# Altium PCB MB1137.PcbDoc (part 4 of 4)
Units mil, origin at the board's own origin, x right, y up, seen from the top; angles counter-clockwise.
Board outline 2760.94 x 5254.68 mil, 6 copper layers (Top Layer, GND, Signal, PWR, GND (Mid2), Bottom Layer), stack 74.545 mil thick; 293 components, 281 nets, 1134 pads, 921 vias.
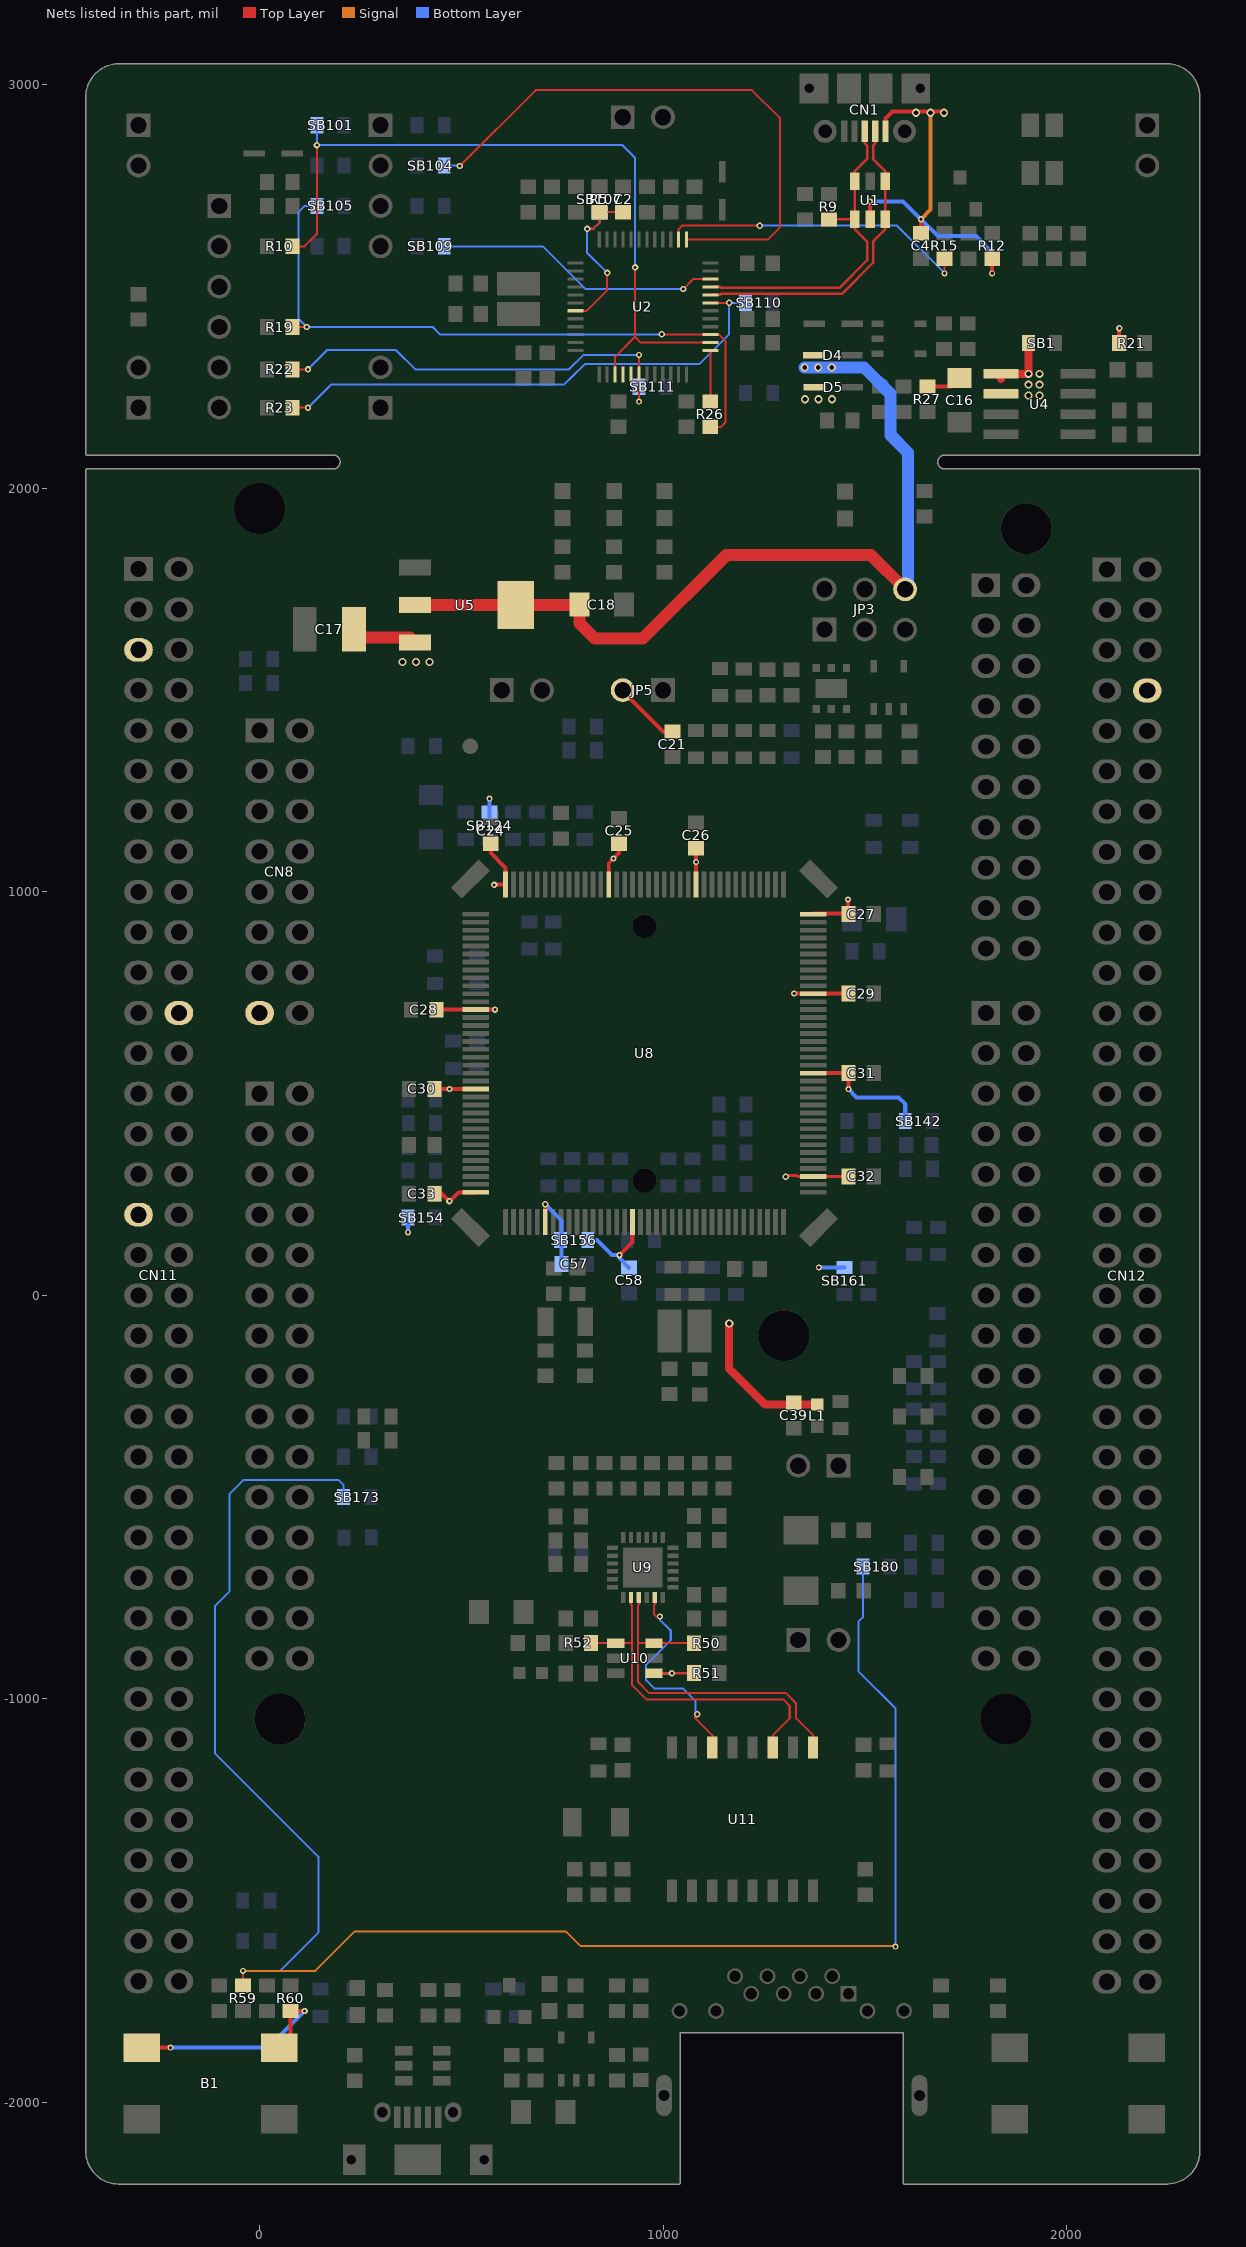
[diagram p8: the nets of this part, all layers, seen from the top]

## Via types
v1: diameter 16, hole 8, Top Layer to Bottom Layer, tented both sides, 464 vias
v2: diameter 15, hole 8, Top Layer to Bottom Layer, tented both sides, 415 vias
v3: diameter 20, hole 12, Top Layer to Bottom Layer, tented both sides, 39 vias
v4: diameter 25.98, hole 12.99, Top Layer to Bottom Layer, tented both sides, 2 vias
v5: diameter 15, hole 8, Top Layer to Bottom Layer, 1 vias

## Nets (pads, with @x,y where several pads share a name; then routed paths per layer and width w, separated by ;. In a path a pad name is that pad's centre, name@x,y a point inside that pad or via, vN(x,y) a via of type N, cw(c..) or ccw(c..) an arc to the next point about the centre after c; other vN are vias at no path point) (continued)
RD_P: R51.1 U9.23 U10.1 U11.6 | length 697.2
  Top Layer w5: R51.1@1076.1,-936.4 R51.1@1076.5,-936
  Top Layer w5.1: U10.1@977.56,-936.4 v1(1022,-936.4) R51.1@1076.1,-936.4 ; U9.23@979.53,-749.12 979.53,-766.15 977.19,-768.49 977.19,-789.5 983.03,-795.34 991.34,-795.34 v2(992,-796) ; v1(1085,-1038) 1079.5,-1043.5 1079.5,-1047.65 1122,-1090.15 U11.6@1122,-1120.44
  Bottom Layer w5: 958,-936 958.4,-936.4
  Bottom Layer w5.1: 958.4,-936.4 v1(1022,-936.4) ; v2(992,-796) 992,-803.54 1019,-830.54 1019,-854.21 958,-915.21 958,-936 958,-954 977.85,-973.85 1049,-973.85 1080.08,-1004.92 1080.08,-1033.07 v1(1085,-1038)
STLINK_USB_DM: CN1.2 U1.1 U1.6 U2.32 | length 788.8
  Top Layer w6.1: U2.32@1117.32,2479.53 1140.73,2479.53 1143.07,2481.87 1443.08,2481.87 1520.5,2559.29 1520.5,2611.95 1550.4,2641.85 U1.6@1550.4,2666.76 U1.1@1550.4,2761.24 1550.4,2786.85 1520.5,2816.75 1520.5,2849.76 1525.59,2854.85 CN1.2@1525.59,2885
STLINK_USB_DP: CN1.3 R9.1 U1.3 U1.4 U2.33 | length 828.8
  Top Layer w6.1: U2.33@1117.32,2499.21 1140.73,2499.21 1143.07,2496.87 1436.87,2496.87 1505.5,2565.5 1505.5,2611.95 1475.6,2641.85 U1.4@1475.6,2666.76 ; R9.1@1411,2666.5 1475.35,2666.5 U1.4@1475.6,2666.76 ; CN1.3@1500,2885 1500,2854.85 1505.5,2849.35 1505.5,2816.75 1475.6,2786.85 U1.3@1475.6,2761.24 U1.4@1475.6,2666.76
STM_JTCK: SB104.2 U2.37 | length 1453.6
  Top Layer w5: v1(496,2799) 684,2987 1220,2987 1290,2917 1290,2647 1260.32,2617.32 U2.37@1058.27,2617.32
  Bottom Layer w5: SB104.2@457.75,2800 495,2800 v1(496,2799)
STM_JTMS: SB109.2 U2.34 | length 716.8
  Top Layer w5: v2@1047,2494 v2(1050,2494) 1074.9,2518.9 U2.34@1117.32,2518.9
  Bottom Layer w5: SB109.2@457.75,2600 702,2600 808,2494 v2(1050,2494)
STM_RST: C2.2 R5.1 SB107.2 U2.7 | length 453.7
  Top Layer w5: U2.7@782.68,2440.1 810.42,2440.1 861.42,2491.1 v1(861.42,2534) ; v1@812,2644.53 827.64,2644.53 842,2658.89 R5.1@842,2684.5 C2.2@901,2684.5
  Bottom Layer w5: SB107.2@843,2682.25 843,2659 827,2643 v1(812,2643) 812,2583.42 v1(861.42,2534)
T_JTCK: R10.2 SB101.1 U2.15 U2.26 | length 1894
  Top Layer w5: R10.2@81.5,2600 111.25,2600 142.25,2631 v1(142.25,2851) ; U2.15@881.1,2282.68 U2.15@881.1,2282.68 881.1,2326.46 930.53,2375.89 ; v1(930.53,2547.64) 930.53,2375.89 ; U2.26@1117.32,2361.42 945,2361.42 930.53,2375.89
  Bottom Layer w5: SB101.1@142.25,2900 v1(142.25,2851) 899,2851 930.53,2819.47 v1(930.53,2547.64)
T_JTDI: U2.17
T_JTDO: U2.16
T_JTMS: R19.2 R26.2 SB105.1 U2.27 | length 1677.1
  Top Layer w5: R19.2@81.5,2400 v1(117,2400) ; v1@997.9,2381.1 U2.27@1117.32,2381.1 1138.94,2381.1 1154.5,2365.54 1154.5,2163.3 1143.7,2152.5 R26.2@1117,2152.5
  Bottom Layer w5: SB105.1@142.25,2700 112,2700 96,2684 96,2421 v1(117,2400) 429,2400 447.9,2381.1 v1@997.9,2381.1
  other v1: 997,2382
T_NRST: R22.2 SB111.1 U2.18 | length 1072.7
  Top Layer w5: R22.2@81.5,2295 v1@119.94,2295 ; v2(940.16,2215) U2.18@940.16,2282.68 v2(940.16,2331)
  Bottom Layer w5: v1@116,2294.94 v1(120,2294.94) ; v1@121.94,2294.94 v1(120,2294.94) ; v2(940.16,2215) 940.25,2215.09 SB111.1@940.25,2252 ; v2(940.16,2331) 803,2331 766.94,2294.94 385.4,2294.94 336.95,2343.39 168.45,2343.39 v1(120,2294.94)
T_SWDIO_IN: R26.1 U2.25 | length 125.9
  Top Layer w5: R26.1@1117.32,2215.82 U2.25@1117.32,2341.73
T_SWO: R23.2 SB110.1 U2.31 | length 1324.8
  Top Layer w5: R23.2@81.5,2200 v1(120,2200) ; U2.31@1117.32,2459.84 v1@1164.84,2459.84
  Bottom Layer w5: v1(120,2200) 177.03,2257.03 754.3,2257.03 774.67,2277.4 775.4,2277.4 806,2308 1090,2308 1164,2382 v1(1164,2460) 1164,2460.68 1164.84,2459.84 1165,2460 SB110.1@1204.25,2460
TD_N: R52.1 U9.20 U10.4 U11.3 | length 850.8
  Top Layer w5.1: R52.1@821.5,-861 883.07,-861 922.22,-861 ; U9.20@920.47,-749.12 920.47,-766.15 922.82,-768.49 922.82,-965.03 958.79,-1001 1297.37,-1001 1314,-1017.63 1314,-1048.15 1272,-1090.15 U11.3@1272,-1120.44
TD_P: R50.1 U9.21 U10.3 U11.1 | length 888.7
  Top Layer w5.1: 938.82,-862 977.56,-862 977.96,-862 R50.1@1076.5,-862 ; U9.21@940.16,-749.12 940.16,-766.15 937.82,-768.49 937.82,-957.81 965,-985 1303.59,-985 1330,-1011.41 1330,-1048.15 1372,-1090.15 U11.1@1372,-1120.44
  Top Layer w6: U10.3@977.56,-861.6 U10.3@977.96,-862
U5V: C4.2 C16.1 CN1.1 CN12.8 D5.1 R12.2 R21.1 R27.1 SB1.1 U1.5 U4.1 U4.2 | length 1260.5
  Top Layer w10: U1.5@1513,2666.76 v2(1513,2711) ; CN1.1@1551.18,2885 1551.18,2917.18 1568,2934 v3@1696,2934 ; C4.2@1639,2632.5 v2(1639,2667) ; R27.1@1655,2252.5 1713.5,2252.5 C16.1@1735,2274 ; v2(1815.7,2533) R12.2@1815.7,2569.5 ; R21.1@2130.5,2360 v1@2130.5,2396.5
  Top Layer w20: 1837.53,2271 U4.1@1837.53,2284 1905.25,2284 SB1.1@1905.25,2360
  Signal w10: v2(1639,2667) 1663,2691 v3(1663,2931)
  Bottom Layer w10: v2(1513,2711) 1595,2711 v2(1639,2667) 1681,2625 1775,2625 1815.7,2584.3 v2@1815.7,2537.3 ; v3(1696,2931) v3@1696,2934
  other v1: 2131,2397
  other v3: 1352,2221 1385.5,2221 1419,2221 1906,2230 1933,2230 1906,2257 1933,2257 1906,2284 1933,2284 1627,2931
USB_RENUMN: R15.2 U2.38 | length 773.2
  Top Layer w5: U2.38@1038.58,2617.32 1038.58,2642.58 1047,2651 v1(1239.75,2651) ; v2(1697.7,2533) R15.2@1697.7,2569.5
  Bottom Layer w5: v1(1239.75,2651) 1579.7,2651 v2(1697.7,2533)
USR_BUT: R59.2 SB173.2 SB180.1 | length 4458.8
  Top Layer w5: R59.2@-41,-1710.5 v2(-41,-1674)
  Signal w5: v2(-41,-1674) 138,-1674 235,-1577 760,-1577 796,-1613 1575,-1613 v2(1576,-1614)
  Bottom Layer w5: v2(-41,-1674) 51,-1674 145.5,-1579.5 145.5,-1391 -110,-1135.5 -110,-769 -74,-733 -74,-492 -39.97,-457.97 195.97,-457.97 208.25,-470.25 SB173.2@208.25,-500 ; SB180.1@1495.25,-672 1495.25,-797.75 1484,-809 1484,-931 1576,-1023 v2(1576,-1614)
VBAT: C57.1 CN11.33 SB156.2 U8.6 | length 209.3
  Top Layer w10: U8.6@707.94,181.69 v1(707.94,226.15)
  Bottom Layer w10: v1(707.94,226.15) 748.2,185.88 C57.1@748.2,78
VDD: B1.2 B1.3 C21.1 C24.1 C25.1 C26.1 C27.1 C28.1 C29.1 C30.1 C31.1 C32.1 C33.1 C39.1 C58.1 CN11.5 JP5.2 L1.1 R60.1 SB124.2 SB142.2 SB154.2 SB156.1 SB161.1 U8.17 U8.39 U8.52 U8.62 U8.72 U8.84 U8.95 U8.108 U8.121 U8.131 U8.144 | length 2955.3
  Top Layer w8: U8.95@865.42,1018.31 865.42,1071.42 v2(877,1083) ; v1(1304,294) 1307.2,297.2 1331.21,297.2 1333.53,294.88 U8.39@1372.31,294.88 1372.43,295 C32.1@1459.5,295
  Top Layer w10: B1.2@-292.28,-1864.42 v2(-220.58,-1864.42) ; B1.3@48.28,-1864.42 77,-1835.69 R60.1@77,-1773.5 v1(111.5,-1773.5) ; C33.1@433.5,252 451.42,252 470.42,233 492.93,255.51 U8.144@535.69,255.51 ; C30.1@434.08,511.42 v2(470.58,511.42) U8.131@535.69,511.42 ; C28.1@439,708 v1@583.2,708 ; C24.1@573,1119.5 573,1095.97 609.51,1059.46 U8.108@609.51,1018.31 582.31,1018.31 v1(581.2,1017.2) ; v2(877,1083) 891,1097 C25.1@891,1119.5 ; v1(892,100) 924.47,132.47 U8.17@924.47,181.69 ; JP5.2@900,1500 900,1497.74 1000.24,1397.5 C21.1@1023,1397.5 ; U8.84@1081.95,1018.31 1081.95,1082.95 1082,1083 C26.1@1082,1108.5 C26.1@1082,1119.5 ; v2(1325,748) C29.1@1459.5,748 C29.1@1459.14,747.64 ; U8.52@1372.31,550.79 1459.29,550.79 C31.1@1459.5,551 v2(1459.5,511) ; U8.72@1372.31,944.49 1374.02,946.2 C27.1@1458.3,946.2 ; v2(1458,981) 1458,946.5 C27.1@1458.3,946.2 ; C32.1@1459.39,294.88 C32.1@1459.5,295 ; C27.1@1459.5,945 C27.1@1458.3,946.2
  Top Layer w20: v3(1164,-70) 1163.32,-70 1163.32,-181.11 1252.7,-270.5 L1.1@1382,-270.5
  Bottom Layer w10: v2(-220.58,-1864.42) 20.57,-1864.42 v1(111.5,-1773.5) ; v2(368.19,156.32) SB154.2@368.19,192.83 ; SB124.2@570,1184.75 SB124.2@570,1197.75 v2(570,1231) ; SB156.1@813.45,137 836,137 873,100 v1(892,100) 892,92.5 C58.1@916,68.5 ; v2(1386,69) 1386.45,69.45 SB161.1@1450,69.45 ; v2(1459.5,511) 1479.5,491 1583,491 1600.25,473.75 SB142.2@1600.25,432
  other v1: 470.42,233.71 583.46,708.27
  other v2: 1082,1074
VIN: C17.1 CN8.15 CN11.24 U5.3 | length 201.6
  Top Layer w20: C17.1@234.02,1614.02 C17.1@234.02,1651
  Top Layer w30: C17.1@234.02,1651 255.02,1630 373,1630 U5.3@385,1618
  other v3: 354.24,1570 387.74,1570 421.24,1570
VIN_5V: C18.1 D4.1 JP3.6 U5.2 U5.4 | length 2142.7
  Top Layer w20: C18.1@792,1711 C18.1@793,1712
  Top Layer w30: U5.2@385,1711 U5.4@635,1711 C18.1@792,1711 ; C18.1@793,1712 793,1666 831,1628 950,1628 1157,1835 1515,1835 JP3.6@1600,1750
  Bottom Layer w30: v3(1351,2300) v3(1384.5,2300) v3(1418,2300) 1497.71,2300 1563.5,2234.21 1563.5,2132.25 1606.61,2089.14 1606.61,1756.61 JP3.6@1600,1750
pads on no net: CN1.11 CN8.1 CN11.10 CN11.26 U2.4 U2.11 U2.14 U2.19 U2.22 U2.40 U2.41 U2.42 U2.43 U2.45 U2.46 U6.3 U6.5 U8.0 U11.4 U11.5 U11.12 U11.13

## Polygon pours and split planes (outlines as drawn)
GND on Bottom Layer "GND" (solid, remove dead copper, pour order 26): -427.95,-2121.26 ccw(c-349.21,-2121.26) -349.21,-2200 -349.21,-2200.04 48,-2200.04 1043.41,-2200.04 2249.06,-2200.04 ccw(c2249.06,-2121.3) 2327.8,-2121.3 2327.8,-2121.1 2327.95,-2121.1 2327.95,2970.87 ccw(c2249.21,2970.87) 2249.21,3049.61 -349.21,3049.61 ccw(c-349.21,2970.87) -427.95,2970.87 -427.95,-2121.26
GND on Signal "GND" (solid, remove dead copper, pour order 27): -427.95,-2121.26 ccw(c-349.21,-2121.26) -349.21,-2200 -349.21,-2200.04 48,-2200.04 1043.41,-2200.04 2249.06,-2200.04 ccw(c2249.06,-2121.3) 2327.8,-2121.3 2327.8,-2121.1 2327.95,-2121.1 2327.95,2970.87 ccw(c2249.21,2970.87) 2249.21,3049.61 -349.21,3049.61 ccw(c-349.21,2970.87) -427.95,2970.87 -427.95,-2121.26
GND on Top Layer "GND" (solid, remove dead copper, pour order 28): -427.95,-2121.26 ccw(c-349.21,-2121.26) -349.21,-2200 -349.21,-2200.04 48,-2200.04 1043.41,-2200.04 2249.06,-2200.04 ccw(c2249.06,-2121.3) 2327.8,-2121.3 2327.8,-2121.1 2327.95,-2121.1 2327.95,2970.87 ccw(c2249.21,2970.87) 2249.21,3049.61 -349.21,3049.61 ccw(c-349.21,2970.87) -427.95,2970.87 -427.95,-2121.26
GND on GND (Mid2) "GND" (solid, remove dead copper, pour order 21): -427.95,-2121.26 ccw(c-349.21,-2121.26) -349.21,-2200 -349.21,-2200.04 48,-2200.04 1043.41,-2200.04 2249.06,-2200.04 ccw(c2249.06,-2121.3) 2327.8,-2121.3 2327.8,-2121.1 2327.95,-2121.1 2327.95,2970.87 ccw(c2249.21,2970.87) 2249.21,3049.61 -349.21,3049.61 ccw(c-349.21,2970.87) -427.95,2970.87 -427.95,-2121.26
+5V on PWR "5V" (solid, remove dead copper, pour order 37): 1665.77,1684.11 cw(c1665.77,1647.08) 1702.81,1647.08 1702.81,-296.19 cw(c1680,-296.19) 1680,-319 1278.44,-318.85 ccw(c1278.44,-336.44) 1260.85,-336.44 1260.79,-663.19 cw(c1234.19,-663.19) 1234.19,-689.79 704.57,-689.31 ccw(c704.57,-715.57) 678.31,-715.57 680.17,-2195.17 cw(c676.17,-2195.17) 676.17,-2199.17 490.95,-2199.05 cw(c490.95,-2192.05) 483.95,-2192.05 480.68,-601.27 cw(c502.27,-601.27) 502.27,-579.68 1179.1,-579.66 ccw(c1179.1,-550.1) 1208.66,-550.1 1208.32,-272.54 cw(c1234.54,-272.54) 1234.54,-246.32 1581.42,-246.21 ccw(c1581.42,-228.42) 1599.21,-228.42 1599,1518.78 ccw(c1562.68,1518.78) 1562.68,1555.1 1562.68,1555.37 467.26,1555.37 cw(c467.26,1556.48) 466.15,1556.48 466.15,1592.88 ccw(c443.94,1592.88) 443.94,1615.09 338.09,1615.09 ccw(c338.09,1589.91) 312.91,1589.91 312.91,868.14 cw(c298.95,868.14) 298.95,854.17 -228.79,854.17 cw(c-228.79,871.99) -246.61,871.99 -246.61,1014.11 cw(c-220.95,1014.11) -220.95,1039.77 142.47,1039.77 ccw(c142.47,1052.8) 155.5,1052.8 155.5,1679.61 cw(c234.72,1679.61) 234.72,1758.83 1106.99,1758.83 cw(c1106.99,1740.98) 1124.84,1740.98 1124.84,1700.82 ccw(c1141.89,1700.82) 1141.89,1683.77 1141.89,1684.11
AVDD on PWR "AVDD" (solid, remove dead copper, pour order 23): 1290,-325.62 1280.43,-325.62 ccw(c1280.43,-340.06) 1266,-340.06 1265.61,-443.65 ccw(c1270.35,-443.65) 1270.35,-448.39 1828.23,-449.12 ccw(c1828.23,-428.23) 1849.12,-428.23 1849,523.37 ccw(c1824.11,523.37) 1824.11,548.26 1778.21,548.26 cw(c1778.21,556.71) 1769.76,556.71 1769.76,646.68 cw(c1780,646.68) 1780,656.92 2292.76,656.92 ccw(c2292.76,678.83) 2314.68,678.83 2314.68,1336.32 ccw(c2302,1336.32) 2302,1349 2163.72,1349 cw(c2163.72,1370.99) 2141.73,1370.99 2141.73,1532.27 ccw(c2123,1532.27) 2123,1551 2061.14,1551 cw(c2061.14,1584.11) 2028.03,1584.11 2028.03,1589.08 ccw(c2006.14,1589.08) 2006.14,1610.97 1733.47,1610.97 ccw(c1733.47,1591.43) 1713.92,1591.43 1713.92,-293.97 cw(c1680.9,-293.97) 1680.9,-327 1272.85,-327 ccw(c1272.85,-329.43) 1270.42,-329.43
AGND on PWR "AGND" (solid, remove dead copper, pour order 25): 1806.21,652.42 1786.17,652.42 ccw(c1786.17,644.25) 1778,644.25 1778,559.1 ccw(c1783.1,559.1) 1783.1,554 1834.26,554 cw(c1834.26,533.26) 1855,533.26 1855,-434 cw(c1837,-434) 1837,-452 1309.69,-452 ccw(c1309.69,-487.91) 1273.78,-487.91 1273.78,-649.48 ccw(c1308.3,-649.48) 1308.3,-684 1571,-684 cw(c1571,-703) 1590,-703 1590,-2168 ccw(c1622,-2168) 1622,-2200 2252.45,-2200 ccw(c2252.45,-2122.14) 2330.31,-2122.14 2330.31,606.69 ccw(c2285,606.69) 2285,652
AVDD on PWR "AVDD" (solid, remove dead copper, pour order 22): 1742.08,1613.45 2002.63,1613.45 cw(c2002.63,1588.08) 2028,1588.08 ccw(c2062.08,1588.08) 2062.08,1554 2066,1554 2127.94,1554 cw(c2127.94,1540.94) 2141,1540.94 2141,1377 ccw(c2166,1377) 2166,1352 2299.61,1352 cw(c2299.61,1337) 2314.61,1337 2314.61,678.83 cw(c2292.77,678.83) 2292.77,657 1739.43,657 cw(c1739.43,682.43) 1714,682.43 1714,1597 cw(c1730,1597) 1730,1613
NetC44_2 on PWR "RMII" (solid, remove dead copper, pour order 36): 1557.72,-701.01 cw(c1557.72,-728.28) 1584.99,-728.28 1584.08,-1233.08 cw(c1553.08,-1233.08) 1553.08,-1264.08 722.53,-1263.51 cw(c722.53,-1234.47) 693.49,-1234.47 693.05,-712.12 cw(c703.12,-712.12) 703.12,-702.05
VIN on PWR "VIN" (solid, remove dead copper, pour order 34): 229.26,843.25 -221.2,843.25 ccw(c-221.2,818) -246.45,818 -246.45,630.44 ccw(c-228.01,630.44) -228.01,612 392.71,612 ccw(c392.71,675.29) 456,675.29 456,1592.14 ccw(c443.14,1592.14) 443.14,1605 338,1605 ccw(c338,1590) 323,1590 323,862 cw(c304,862) 304,843
NetC11_2 on PWR "VIN_2" (solid, remove dead copper, pour order 30): 2105.62,2375.29 ccw(c2096.91,2375.29) 2096.91,2384 1475,2384 ccw(c1475,2370) 1461,2370 1461,2353.46 cw(c1452,2353.46) 1452,2344.46 1194.29,2344.46 ccw(c1194.29,2322) 1171.83,2322 1171.83,2009.56 ccw(c1190,2009.56) 1190,1991.39 1442.06,1991.39 cw(c1442.06,1980.45) 1453,1980.45 1453.44,1705.6 ccw(c1465.6,1705.6) 1465.6,1693.44 1531.93,1693.17 ccw(c1531.93,1713.07) 1551.83,1713.07 1551.99,2019.49 ccw(c1538.58,2019.49) 1538.58,2032.89 1245.24,2032.89 cw(c1245.24,2049.12) 1229.01,2049.12 1229.01,2077.05 cw(c1249.75,2077.05) 1249.75,2097.78 1299.61,2097.78 ccw(c1299.61,2111.44) 1313.27,2111.44 1313.27,2238.59 cw(c1330.24,2238.59) 1330.24,2255.56 1838.98,2255.56 ccw(c1838.98,2266) 1849.41,2266 1849.41,2287.65 cw(c1873.14,2287.65) 1873.14,2311.38 2090.99,2311.38 ccw(c2090.99,2326) 2105.61,2326
E5V on PWR "E5V" (solid, remove dead copper, pour order 24): 1441,2434 cw(c1441,2428) 1447,2428 1447,2356.26 cw(c1444.74,2356.26) 1444.74,2354 1184.85,2354.15 ccw(c1184.85,2333.15) 1163.85,2333.15 1163.39,2005.95 ccw(c1185.95,2005.95) 1185.95,1983.39 1431.71,1983.86 cw(c1431.71,1972.73) 1442.84,1972.73 1442.64,1711.2 cw(c1426.8,1711.2) 1426.8,1695.36 1328.99,1695.69 cw(c1328.99,1706.99) 1317.69,1706.99 1318,1864 ccw(c1301,1864) 1301,1881 138,1881 ccw(c138,1847) 104,1847 cw(c90,1847) 90,1833 -81.74,1833 ccw(c-81.74,1819.93) -94.8,1819.93 -94.8,1542.39 cw(c-109,1542.39) -109,1528.19 -249.32,1528.19 cw(c-249.32,1539.87) -261,1539.87 -261,2011.9 cw(c-240,2011.9) -240,2032.9 1073.9,2032.9 ccw(c1073.9,2052) 1093,2052 1093,2415.27 cw(c1111.73,2415.27) 1111.73,2434 1551.87,2434 cw(c1551.87,2425.87) 1560,2425.87
+3V3 on PWR "3V3" (solid, remove dead copper, pour order 33): -248.19,1434.31 -248.4,1434.31 -248.4,1468 -248.4,1501.65 cw(c-234.15,1501.65) -234.15,1515.9 -95.92,1515.9 ccw(c-95.92,1530.53) -81.29,1530.53 -81.29,1801.52 cw(c-60.88,1801.52) -60.88,1821.93 105.53,1821.93 ccw(c105.53,1836.14) 119.74,1836.14 119.74,1847.74 cw(c143,1847.74) 143,1871 1301.51,1871 cw(c1301.51,1864.62) 1307.89,1864.62 1307.89,1700.89 cw(c1301,1700.89) 1301,1694 1141.89,1694 cw(c1141.89,1701) 1134.89,1701 1134.89,1761.03 ccw(c1127,1761.03) 1127,1768.92 233.17,1768.92 ccw(c233.17,1678) 142.25,1678 142.25,1074.26 cw(c124.08,1074.26) 124.08,1056.08 -232.08,1056.08 cw(c-232.08,1072) -248,1072 -248,1451
VBAT on PWR "VBAT" (solid, remove dead copper, pour order 32): -414.91,224 -414.91,229.43 cw(c-403.34,229.43) -403.34,241 215.04,241 cw(c215.04,189.04) 267,189.04 267,152.5 ccw(c299.5,152.5) 299.5,120 569.52,120 ccw(c569.52,148) 597.52,148 597.52,228.52 cw(c628,228.52) 628,259 714.43,259 cw(c714.43,249) 724.43,249 724.43,35.79 cw(c693.64,35.79) 693.64,5 -392,5 cw(c-392,28) -415,28
+3V3_ST_LINK on PWR "ST_3V3" (solid, remove dead copper, pour order 31): -335,3037 -353,3037 ccw(c-353,2975) -415,2975 -415,2107 ccw(c-406,2107) -406,2098 1080.53,2098 ccw(c1080.53,2104.47) 1087,2104.47 1087,2418.35 cw(c1109.65,2418.35) 1109.65,2441 1443.76,2441 cw(c1443.76,2428.46) 1456.3,2428.46 1456.3,2396.7 ccw(c1463,2396.7) 1463,2390 2096.07,2390 ccw(c2096.07,2399) 2105.07,2399 2105.07,2714 ccw(c2005.07,2714) 2005.07,2814 1996,2814 1488,2814 cw(c1488,2832) 1470,2832 1470,3022.06 ccw(c1455,3022.06) 1455,3037.06 -335,3037.06
U5V on PWR "U5V" (solid, remove dead copper, pour order 35): 1375.1,2247.98 1335.51,2247.98 ccw(c1335.51,2234) 1321.53,2234 1321.53,2110.79 ccw(c1335.32,2110.79) 1335.32,2097 1546.78,2097 cw(c1546.78,2085.78) 1558,2085.78 1558.07,1703.07 ccw(c1568.07,1703.07) 1568.07,1693.07 1686.49,1692.49 cw(c1686.49,1663.49) 1715.49,1663.49 1715,1636 ccw(c1730,1636) 1730,1621 2006,1621 cw(c2006,1589) 2038,1589 2038,1587 ccw(c2064,1587) 2064,1561 2129.01,1561 cw(c2129.01,1539) 2151.01,1539 2151.01,1381.54 ccw(c2172.55,1381.54) 2172.55,1360 2300,1360 ccw(c2300,1374) 2314,1374 2314,2026.58 ccw(c2307.88,2026.58) 2307.88,2032.7 1692.22,2032.7 cw(c1692.22,2045) 1679.92,2045 1679.92,2089.92 cw(c1685,2089.92) 1685,2095 2305,2095 ccw(c2305,2106) 2316,2106 2316,2976 ccw(c2254,2976) 2254,3038 1496.37,3038 ccw(c1496.37,3020) 1478.37,3020 1478.37,2844.63 ccw(c1502,2844.63) 1502,2821 2021.94,2821 cw(c2021.94,2723.94) 2119,2723.94 2119,2320.12 cw(c2100.88,2320.12) 2100.88,2302 1876.69,2302 ccw(c1876.69,2291) 1865.69,2291 1865.69,2267.69 cw(c1846,2267.69) 1846,2248
NetC51_2 on PWR "RMII_2" (solid, remove dead copper, pour order 38): 720.09,-1280 1554.49,-1279.51 cw(c1554.49,-1308.51) 1583.49,-1308.51 1585.18,-2175.08 cw(c1564.08,-2175.08) 1564.08,-2196.18 723.21,-2194.71 cw(c723.21,-2171.79) 700.29,-2171.79 699.31,-1289.49 cw(c708.49,-1289.49) 708.49,-1280.31
VDD on PWR "VDD" (solid, remove dead copper, pour order 40): -415.39,-815.16 -415,-815.16 -415,-823 -415,-2126 ccw(c-353,-2126) -353,-2188 331,-2188 ccw(c331,-2174) 345,-2174 345,-367.93 cw(c382.42,-367.93) 382.42,-330.52 1042.47,-330.52 ccw(c1042.47,-268.92) 1104.07,-268.92 1104.07,-203.86 cw(c1140,-203.86) 1140,-167.92 1444.14,-167.92 ccw(c1444.14,-127.97) 1484.09,-127.97 1484.09,1416.98 ccw(c1450,1416.98) 1450,1451.08 964.49,1451.08 cw(c964.49,1471.99) 943.58,1471.99 943.58,1534 ccw(c932.35,1534) 932.35,1545.23 482.16,1545.23 ccw(c482.16,1532.32) 469.24,1532.32 469.24,652.38 cw(c415.16,652.38) 415.16,598.29 -231.29,598.29 cw(c-231.29,621) -254,621 -254,2014.61 ccw(c-272.5,2014.61) -272.5,2033.11 -394,2033.11 ccw(c-394,2011.96) -415.15,2011.96 -415.15,278 ccw(c-389.07,278) -389.07,251.92 225.17,251.92 cw(c225.17,192) 285.09,192 285.09,150.82 ccw(c303,150.82) 303,132.91 562.75,132.91 ccw(c562.75,154.92) 584.76,154.92 584.76,243.86 cw(c616,243.86) 616,275.1 712.85,275.1 cw(c712.85,252.04) 735.91,252.04 735.91,30.57 cw(c696.63,30.57) 696.63,-8.71 -384.69,-8.71 ccw(c-384.69,-39.21) -415.19,-39.21 -415.19,-822.98
+3V3_PER on PWR "3V3" (solid, remove dead copper, pour order 39): 474.79,-1819 474.6,-2196.13 cw(c469.13,-2196.13) 469.13,-2201.6 365.69,-2201.6 cw(c365.69,-2189.31) 353.4,-2189.31 353,-385.31 cw(c404,-385.31) 404,-334.31 1075.66,-334.31 ccw(c1075.66,-303.26) 1106.71,-303.26 1106.71,-208.53 cw(c1142.25,-208.53) 1142.25,-172.99 1462.01,-172.99 ccw(c1462.01,-147) 1488,-147 1488,1419.22 ccw(c1448.22,1419.22) 1448.22,1459 1058.44,1458.44 cw(c1058.44,1477.44) 1039.44,1477.44 1039.27,1534.35 ccw(c1038.35,1534.35) 1038.35,1535.27 1038.66,1535.34 cw(c1046.66,1535.34) 1046.66,1543.34 1545,1543 cw(c1545,1501) 1587,1501 1587,-221.31 cw(c1574,-221.31) 1574,-234.31 1229.66,-234.31 ccw(c1229.66,-263.96) 1200,-263.96 1199.78,-529.98 cw(c1162.98,-529.98) 1162.98,-566.78 501.81,-566.42 ccw(c501.81,-592.3) 475.93,-592.3
GND on GND "GND" (solid, remove dead copper, pour order 29): -427.95,-2121.26 ccw(c-349.21,-2121.26) -349.21,-2200 -349.21,-2200.04 48,-2200.04 1043.41,-2200.04 2249.06,-2200.04 ccw(c2249.06,-2121.3) 2327.8,-2121.3 2327.8,-2121.1 2327.95,-2121.1 2327.95,2970.87 ccw(c2249.21,2970.87) 2249.21,3049.61 -349.21,3049.61 ccw(c-349.21,2970.87) -427.95,2970.87 -427.95,-2121.26

## Keep-outs
Keep-Out Layer:
  lines w5: -349.37,-2200.04 1040,-2200.04 1040,-1825.16 1598,-1825.16 1598,-2200.04 2249.06,-2200.04 ; -349.21,-2200 cw(c-349.21,-2121.26) -427.95,-2121.26 -427.95,2045.67 182.28,2045.67 ccw(c182.28,2065.35) 182.28,2085.04 -427.95,2085.04 -427.95,2970.87 cw(c-349.21,2970.87) -349.21,3049.61 2249.21,3049.61 cw(c2249.21,2970.87) 2327.95,2970.87 ; 2249.06,-2199.84 ccw(c2249.06,-2121.1) 2327.8,-2121.1 ; 2327.95,-2121.26 2327.95,2045.67 1698.03,2045.67 cw(c1698.03,2065.35) 1698.03,2085.04 2327.95,2085.04 2327.95,2970.87 ; 2327.95,2970.87 2327.95,2970.87 ; 320.08,2045.67 cw(c320.08,2065.35) 320.08,2085.04 1068.11,2085.04 cw(c1068.11,2065.35) 1068.11,2045.67 320.08,2045.67 ; 1250,2045.67 cw(c1250,2065.35) 1250,2085.04 1538.58,2085.04 cw(c1538.58,2065.35) 1538.58,2045.67 1250,2045.67

## Other copper
Top Layer:
  rectangle net VIN: 343.24,1558 435,1641
  rectangle net VIN_5V: 1340,2288 1430,2343
  rectangle net +3V3_ST_LINK: 1619,2385 1843,2436.06
  rectangle net U5V: 1703,2216 1946,2300
  rectangle net NetC11_2: 1957,2330 2071,2384
  rectangle net E5V: 1341,2366 1431,2421
  rectangle net U5V: 1341,2209 1431,2264
  pour cut-out: 1280.56,891 1252,891 1252,866 1280.25,866
  pour cut-out: -7,-1818.98 -7,-1802 0,-1802 0,-1818.98
  pour cut-out: 1048.79,-891.68 1048.79,-906.31 1057,-906.31 1057,-892
  pour cut-out: 644.5,-890.68 644.5,-910.82 655.48,-910.82 655.48,-891
  pour cut-out: 644.5,-890.68 655.48,-890.68 655.48,-891 656.26,-891
  pour cut-out: 799.95,-751.59 799.95,-771.31 809.93,-771.31 809.93,-751.59
  pour cut-out: -164.47,-1262.49 -142.25,-1262.49 -142.25,-1287 -164,-1287
  pour cut-out: -36.4,729.28 -49.69,729.28 -70.26,708.72 -70.26,619.76 -59.8,619.76 -20.92,658.65
  pour cut-out: 781.69,673.26 719.28,673.26 696.74,650.72 696.74,596.85 710.99,600.99 781.3,656.74
  pour cut-out: 578.17,400.25 647.72,401.22 653.67,392 628.23,366.68 578.17,366.68
  pour cut-out: 794.28,439.26 687.35,332.33 703.24,313.46 821.64,431.86
  pour cut-out: 1603.12,-263.77 1603.12,-274.59 1622,-274.59 1622,-264
  pour cut-out: 1009,-1093.17 1009,-1503 1384.68,-1503 1384.68,-1093 1383,-1093
  pour cut-out: 38.51,1089.68 38.51,1070 55.8,1070 55.8,1090
  pour cut-out: 157.98,1267.96 136,1285 124.99,1269.35 147.1,1253.28
  pour cut-out: 2032,-672 2032,-693.38 2056,-693.38 2056,-672
  pour cut-out: 2032.97,-766 2032.97,-787.38 2056.97,-787.38 2056.97,-766
  pour cut-out: 1695,2169 1695,2176 1684.53,2176 1684.53,2169
  pour cut-out: 1775,2169 1784.22,2169 1784.22,2175 1775,2175
  pour cut-out: 1975.17,2112.19 1981,2112.19 1981,2098 1975,2098
  pour cut-out: 1285.02,-1643.68 1284.4,-1643.06 1284.4,-1634.47 1289.94,-1634.47 1290,-1634.53 1290,-1644
GND:
  pour cut-out: 1009,-1093.17 1009,-1503 1384.68,-1503 1384.68,-1093 1383,-1093
GND (Mid2):
  pour cut-out: 1009,-1093.17 1009,-1503 1384.68,-1503 1384.68,-1093 1383,-1093
Signal:
  pour cut-out: -134,30 -160.13,30 -160.13,2 -133,2
  pour cut-out: 901.29,1244.5 880.9,1244.5 880.9,1215.5 900.29,1215.5
  pour cut-out: -71.23,1017.2 -105,1017.2 -105,988 -71.94,988
  pour cut-out: -45.96,708.32 -45.96,684 -73,684 -73,708.32
  pour cut-out: 1945,377 1910.32,377 1910.32,354 1944.28,354
  pour cut-out: 1009,-1093.17 1009,-1503 1384.68,-1503 1384.68,-1093 1383,-1093
  pour cut-out: 1137.79,1095.57 1137.79,1071.25 1110.75,1071.25 1110.75,1095.57
  pour cut-out: 1260.04,699.32 1260.04,675 1233,675 1233,699.32
  pour cut-out: 1570.04,562.32 1570.04,538 1543,538 1543,562.32
  pour cut-out: 587.04,-569.68 587.04,-594 560,-594 560,-569.68
  pour cut-out: 294.15,-762.68 294.15,-787 267.11,-787 267.11,-762.68
  pour cut-out: 160.17,-667.68 160.17,-692 133.13,-692 133.13,-667.68
  pour cut-out: 161.04,-570.68 161.04,-595 134,-595 134,-570.68
  pour cut-out: -128.96,-693.68 -128.96,-718 -156,-718 -156,-693.68
  pour cut-out: 191.04,-1590.68 191.04,-1615 164,-1615 164,-1590.68
PWR:
  pour cut-out: 1009,-1093.17 1009,-1503 1384.68,-1503 1384.68,-1093 1383,-1093
Bottom Layer:
  pour cut-out: 1542.73,-952.72 1542.73,-975.55 1568,-975.55 1568,-952
  pour cut-out: -322.32,-242 -322.32,-260.82 -302,-260.82 -302,-241.7
  pour cut-out: 514,651 505,651 505,645 514,645
  pour cut-out: 181.26,-192 181.26,-219.93 214.76,-219.93 214.76,-192
  pour cut-out: 2025,-671.19 2055,-671.19 2055,-697 2025,-697
  pour cut-out: 1617,-370 1617,-378.5 1625,-378.5 1625,-370
  pour cut-out: 1616.75,-252.25 1617,-252.25 1617,-260.7 1625,-260.7 1625,-252
  pour cut-out: 2193,255 2193,236 2170,236 2170,255
  pour cut-out: 360,-9 335.15,-9 335.15,-34.18 360.61,-34.18
  pour cut-out: 809,359.75 800,359.75 800,350 809,350
  pour cut-out: 136.57,139.43 171.47,139.43 171.47,70.56 136.35,70.56
  pour cut-out: 38,239.75 38,162.53 64,162.53 64,240
  pour cut-out: 1200.25,379 1200.25,388.68 1207.09,388.68 1207.09,379
  pour cut-out: 1200.25,448 1208.27,448 1208.27,439 1200.25,439
  pour cut-out: 1009,-1093.17 1009,-1503 1384.68,-1503 1384.68,-1093 1383,-1093

## Silkscreen, mask and mechanical layers (free items; w line width, h text height)
Top Overlay:
  drawing of 1964 lines, arcs and shapes, not listed
  text "USB PWR" at 1256,3034 h40 r270
  text "PWR-EXT" at 827.64,2991.3 h40
  text "GND" at -227,2916 h40 r270
  text "COM" at 1819,2906 h60 r270
  text "GND" at 2088,2899.94 h40 r270
  text "ST-LINK" at 127,2825 h40 r270
  text "NUCLEO" at 434,2825 h40 r270
  text "SWD" at -220,2525 h40 r270
  text "TX" at 368,2282 h40
  text "Over Current" at 2087,2229 h40
  text "RX" at 369,2182 h40
  text "PWR" at 1368,2014 h40 r270
  text "User LEDs" at 430.77,1950 h40
  text "E5V" at 1324,1815 h40
  text "U5V" at 1443,1815 h40
  text "VIN-5V" at 1559,1815 h40
  text "SCL" at 1958.06,1773 h45
  text "D15" at 1962,1719 h40
  text "Power Source" at 970,1702 h40
  text "SDA" at 1958.06,1669 h45
  text "I2S_A" at 1673,1659 h40 r270
  text "D14" at 1962,1618 h40
  text "AVDD" at 1962,1535 h33
  text "USB_EN" at 313.15,1473 h40
  text "GND" at 1962,1438 h40
  text "IDD" at 912,1397 h40
  text "PG7" at 659.45,1395.75 h40
  text "NC" at -129.2,1385 h40
  text "SCK" at 1958,1383 h45
  text "IOREF" at -189,1349 h40 r315
  text "D13" at 1962,1338 h35
  text "I2S_B" at 1693,1323 h40 r270
  text "MISO" at 1958,1290 h45
  text "NRST" at -188,1250 h40 r315
  text "D12" at 1962,1247 h35
  text "SDMMC" at 192,1240 h40 r270
  text "PWM" at 1958,1199 h45
  text "MOSI" at 1958,1164 h45
  text "3V3" at -157,1130 h40 r315
  text "D11" at 1962,1122 h35
  text "PWM" at 1958,1079 h45
  text "SPI_B" at 1681,1047 h40 r270
  text "CS" at 1958,1042 h45
  text "D10" at 1962,997 h35
  text "5V" at -129.01,982 h40
  text "PWM" at 1958,947 h45
  text "GND" at -159.72,919.13 h38 r315
  text "D9" at 1962,905 h35
  text "D8" at 1962,832 h40
  text "GND" at -160.72,817.25 h38 r315
  text "IO" at 198,766 h40 r270
  text "D7" at 1962,691 h40
  text "AVDD" at 1596,688 h40
  text "VIN" at -133.58,681 h40
  text "PWM" at 1958.06,622.84 h45
  text "AGND" at 1591.81,587 h40
  text "D6" at 1962,570 h40
  text "PWM" at 1958.06,512 h45
  text "GND" at 1631.61,486 h40
  text "A0" at -129.39,482 h40
  text "D5" at 1962,465 h40
  text "A1" at -112.25,390 h40
  text "USART" at 170,385 h40 r270
  text "D4" at 1962,381 h40
  text "ADC_IN" at 1667,330 h40 r270
  text "PWM" at 1958.06,311 h45
  text "A2" at -129.39,285 h40
  text "D3" at 1962,260 h40
  text "A3" at -129.39,189 h40
  text "D2" at 1962,180 h40
  text "TX" at 1958.06,118 h45
  text "A4" at -131.29,90 h40
  text "D1" at 1962,71 h40
  text "RX" at 1958.06,12.25 h45
  text "A5" at -129.39,-12 h40
  text "GND" at 164,-19 h40
  text "D0" at 1962,-37 h40
  text "COMP" at -142,-94 h40 r270
  text "QSPI" at 1691,-156 h40 r270
  text "SAI_A" at 187,-173 h40 r270
  text "I2C" at -128,-372 h40 r270
  text "PA7" at 1500.45,-386 h40 r270
  text "TIMER" at 1998,-424 h40 r270
  text "SAI_B" at 193,-577 h40 r270
  text "GND" at -151,-579 h38 r315
  text "GND" at 1631.61,-617 h40
  text "CAN" at -148,-701 h40 r270
  text "TIMER" at 1659.5,-730 h40 r270
  text "PB13" at 1505,-798 h40 r270
  text "IO" at -100.78,-926 h40
  text "IO" at 173,-928 h40
  text "MB1137 Rev B" at 1623.5,-1501.5 h40
  text "USB_FAULT" at 120,-1563 h40
  text "VBUS" at 606,-1563 h40
  text "www.st.com/stm32nucleo" at 978,-1603 h60
  text "Ethernet" at 1670.31,-1810.01 h40 r270
  text "GND" at -314,-1811 h50
  text "GND" at 2087,-1811 h50
  text "USER" at -190,-2164 h40
  text "User USB" at 604,-2164 h40
  text "RESET" at 1942,-2164 h40
Bottom Overlay:
  lines w3: 110,2545 110,2955 240,2955 240,2545 110,2545 ; 350,2545 490,2545 490,2955 350,2955 350,2545
  lines w5: 1577,-727.01 1599.01,-705 ; 1723,558 1726,558 ; 622,-1440 1322,-1440 1322,-1255 622,-1255 622,-1440
  text "RESERVED" at 646,2974 h40
  text "DEFAULT" at 215,2972 h40
  text "SWO" at 1172.92,2439.5 h40
  text "TX" at 234,2283 h40
  text "MCO" at 1293,2273.2 h40
  text "NRST" at 1172,2230 h40
  text "RST" at 914.94,2222.47 h40
  text "RX" at 228,2191 h40
  text "PC8" at 2312,1836 h28 r45
  text "PC11" at -52.49,1783 h28
  text "PC9" at 2051,1782 h28
  text "PC6" at 2318,1740 h28 r45
  text "PC10" at -346,1729 h28 r315
  text "PD2" at -69.99,1683 h28
  text "PB8" at 2051,1682 h28
  text "PC12" at -346,1646 h28 r315
  text "PC5" at 2319,1636 h28 r45
  text "VDD" at -362,1584 h28 r315
  text "E5V" at -69.99,1583 h28
  text "PB9" at 2051,1582 h28
  text "U5V" at 2315,1531 h28 r45
  text "GND" at -69.99,1483 h28
  text "BT0" at -365,1482 h28 r315
  text "AVDD" at 2051,1482 h28
  text "PD8" at 2315,1434 h28 r45
  text "NC" at -104.98,1383 h28
  text "PF6" at -362,1382 h28 r315
  text "GND" at 2051,1382 h28
  text "PA12" at 2319,1310 h28 r45
  text "+3V3" at -44,1283 h28
  text "PA5" at 2051,1282 h28
  text "PF7" at -362,1278 h28 r315
  text "PA11" at 2308,1202 h28 r45
  text "NRST" at -46,1186 h28
  text "PA6" at 2051,1182 h28
  text "PA13" at -346,1143 h28 r315
  text "PB12" at 2312,1103 h28 r45
  text "3V3" at -69.99,1083 h28
  text "PA7" at 2051,1082 h28
  text "PA14" at -346,1042 h28 r315
  text "PB11" at 2314,1004 h28 r45
  text "+5V" at -69.99,983 h28
  text "PB6" at 2051,982 h28
  text "PA15" at -346,944 h28 r315
  text "GND" at 2319,931 h28 r45
  text "GND" at -362,883 h28 r315
  text "GND" at -69.99,883 h28
  text "PC7" at 2051,882 h28
  text "PB2" at 2314,837 h28 r45
  text "GND" at -69.99,783 h28
  text "PB7" at -362,782 h28 r315
  text "PA9" at 2051,782 h28
  text "PB1" at 2308,731 h28 r45
  text "VIN" at -75.82,683 h28
  text "PA8" at 2051,682 h28
  text "PC13" at -346,647 h28 r315
  text "PB15" at 2312,610 h28 r45
  text "PB10" at 2051,582 h28
  text "PC14" at -346,544 h28 r315
  text "PB14" at 2314,507 h28 r45
  text "PA0" at -69.99,483 h28
  text "PB4" at 2051,482 h28
  text "PC15" at -353,452 h28 r315
  text "PB13" at 2320,412 h28 r45
  text "PA1" at -81.65,383 h28
  text "PB5" at 2051,382 h28
  text "OSCI" at -346,345 h28 r315
  text "AGND" at 2322.6,320 h28 r45
  text "PA4" at -69.99,283 h28
  text "PB3" at 2051,282 h28
  text "OSCO" at -346,245 h28 r315
  text "MCO" at 1091,233 h40 r90
  text "PC4" at 2313,229 h28 r45
  text "PB0" at -69.99,183 h28
  text "PA10" at 2051,182 h28
  text "VBAT" at -346,144 h28 r315
  text "PF5" at 2317,135 h28 r45
  text "PC1" at -81.65,83 h28
  text "PA2" at 2051,82 h28
  text "PC2" at -362,62 h28 r315
  text "PF4" at 2315,33 h28 r45
  text "PC0" at -69.99,-17 h28
  text "PA3" at 2051,-18 h28
  text "PC3" at -362,-40 h28 r315
  text "PE8" at 2313,-64 h28 r45
  text "PD3" at -69.99,-117 h28
  text "PD4" at -365,-118 h28 r315
  text "GND" at 2051,-118 h28
  text "PF10" at 2323,-179 h28 r45
  text "PD5" at -366,-217 h28 r315
  text "PG2" at -69.99,-217 h28
  text "PD13" at 2051,-218 h28
  text "PE7" at 2315,-275 h28 r45
  text "PG3" at -69.99,-317 h28
  text "PD12" at 2051,-318 h28
  text "PD6" at -366,-320 h28 r315
  text "PD14" at 2321,-382 h28 r45
  text "PE2" at -69.99,-417 h28
  text "PD11" at 2051,-418 h28
  text "PD7" at -368,-419 h28 r315
  text "PD15" at 2315,-487 h28 r45
  text "PE4" at -69.99,-517 h28
  text "PE3" at -367,-518 h28 r315
  text "PE10" at 2051,-518 h28
  text "PF14" at 2317,-586 h28 r45
  text "GND" at -362,-608 h28 r315
  text "PE5" at -69.99,-617 h28
  text "PE12" at 2051,-618 h28
  text "PE9" at 2315,-666 h28 r45
  text "PF1" at -362,-675 h28 r315
  text "PF2" at -69.99,-717 h28
  text "PE14" at 2051,-718 h28
  text "PH1" at -362,-728 h28 r315
  text "GND" at 2315,-765 h28 r45
  text "PF0" at -362,-796 h28 r315
  text "PF8" at -69.99,-817 h28
  text "PE15" at 2051,-818 h28
  text "PH0" at -362,-848 h28 r315
  text "PE11" at 2320,-878 h28 r45
  text "PF9" at -69.99,-917 h28
  text "PE13" at 2051,-918 h28
  text "PD1" at -362,-920 h28 r315
  text "PF3" at 2318,-972 h28 r45
  text "PD0" at -362,-1011 h28 r315
  text "PG1" at -81.65,-1017 h28
  text "PF13" at 2051,-1018 h28
  text "PF15" at 2321,-1085 h28 r45
  text "GND" at -69.99,-1117 h28
  text "PG0" at -364,-1118 h28 r315
  text "PF12" at 2051,-1118 h28
  text "PF11" at 2314,-1188 h28 r45
  text "PE6" at -69.99,-1217 h28
  text "PG14" at 2051,-1218 h28
  text "PE1" at -365,-1219 h28 r315
  text "MB1137 Rev B" at 1312,-1235 h59.06
  text "PE0" at 2315,-1268 h28 r45
  text "PG15" at -40.83,-1317 h28
  text "GND" at 2051,-1318 h28
  text "PG9" at -364,-1320 h28 r315
  text "PG8" at 2313,-1366 h28 r45
  text "PG10" at -40.83,-1417 h28
  text "PD10" at 2051,-1418 h28
  text "PG13" at -94,-1432 h28 r90
  text "PG12" at -346,-1457 h28 r315
  text "PG5" at 2319,-1472 h28 r45
  text "PH2" at -362,-1516 h28 r315
  text "PG7" at 2051,-1518 h28
  text "PG6" at 2318,-1565 h28 r45
  text "PG11" at -93,-1566 h28 r90
  text "PG4" at 2051,-1618 h28
  text "PD9" at -362,-1623 h28 r315
Mechanical 1:
  lines w5: -427.95,-2121.26 -427.95,2045.67 182.29,2045.66 ccw(c182.29,2065.35) 182.29,2085.03 -427.95,2085.03 -427.95,2970.86 cw(c-349.21,2970.86) -349.21,3049.6 2249.22,3049.6 cw(c2249.22,2970.86) 2327.96,2970.86 ; -427.8,-2121.22 ccw(c-349.06,-2121.22) -349.06,-2199.96 ; -349.21,-2200 2249.21,-2200 ; 2249.22,-2199.8 ccw(c2249.22,-2121.06) 2327.96,-2121.06 ; 2327.96,-2121.26 2327.96,2045.66 1698.03,2045.66 cw(c1698.03,2065.35) 1698.03,2085.03 2327.96,2085.03 2327.96,2970.86 ; 2327.96,2970.86 2327.96,2970.86 ; 320.08,2045.66 cw(c320.08,2065.35) 320.08,2085.03 1068.11,2085.03 cw(c1068.11,2065.35) 1068.11,2045.66 320.08,2045.66 ; 1250,2045.66 cw(c1250,2065.35) 1250,2085.03 1538.59,2085.03 cw(c1538.59,2065.35) 1538.59,2045.66 1250,2045.66
Drill Drawing:
  rectangle: 4947.07,1548.71 5591.07,1565.71
  rectangle: 4947.83,1664.19 5591.83,1681.19
  rectangle: 4947.83,1900.41 5591.83,1917.41
  rectangle: 4947.83,2040.48 5591.83,2057.48
  rectangle: 4945.98,1419.52 5589.98,1436.52
  rectangle: 4947.07,1784.93 5591.07,1801.93
  lines w5: -349.37,-2200.04 1040,-2200.04 1040,-1825.16 1598,-1825.16 1598,-2200.04 2249.06,-2200.04 ; -349.21,-2200 cw(c-349.21,-2121.26) -427.95,-2121.26 -427.95,2045.67 182.28,2045.67 ccw(c182.28,2065.35) 182.28,2085.04 -427.95,2085.04 -427.95,2970.87 cw(c-349.21,2970.87) -349.21,3049.61 2249.21,3049.61 cw(c2249.21,2970.87) 2327.95,2970.87 ; 2249.06,-2199.84 ccw(c2249.06,-2121.1) 2327.8,-2121.1 ; 2327.95,-2121.26 2327.95,2045.67 1698.03,2045.67 cw(c1698.03,2065.35) 1698.03,2085.04 2327.95,2085.04 2327.95,2970.87 ; 3861,3847 3881,3847 ; 2327.95,2970.87 2327.95,2970.87 ; 320.08,2045.67 cw(c320.08,2065.35) 320.08,2085.04 1068.11,2085.04 cw(c1068.11,2065.35) 1068.11,2045.67 320.08,2045.67 ; 1250,2045.67 cw(c1250,2065.35) 1250,2085.04 1538.58,2085.04 cw(c1538.58,2065.35) 1538.58,2045.67 1250,2045.67
  lines w7: 5130.43,1596.54 4992.43,1596.54 4992.43,1635.54 5169.43,1635.54 ; 5130.43,1832.76 4992.43,1832.76 4992.43,1871.76 5169.43,1871.76 ; 5169.43,1596.54 5346.43,1596.54 ; 5169.43,1832.76 5346.43,1832.76 ; 5228.43,1635.54 5366.43,1635.54 ; 5228.43,1871.76 5366.43,1871.76 ; 5386.43,1596.54 5543.43,1596.54 5543.43,1635.54 5425.43,1635.54 ; 5386.43,1832.76 5543.43,1832.76 5543.43,1871.76 5425.43,1871.76
  lines w8: 5012.94,1154.53 5590.08,1154.53 ; 5012.94,1237.03 5589.3,1237.03
  lines w10: 3606,3547 6001,3547 ; 3606,3647 5602,3647 6002,3647 6002,3648 ; 3606,3747 5602,3747 6002,3747 6002,3748 ; 4086,3449 4086,3847 ; 4166.24,2703.49 5829.24,2703.49 ; 4406,3449 4406,3847 ; 4806,3449 4806,3847 ; 4980.74,1956.48 5547.66,1956.48 ; 4980.74,2001.41 5547.66,2001.41 ; 4985.88,1706.84 5552.81,1706.84 ; 4985.88,1751.77 5552.81,1751.77 ; 4997.69,1474.55 5564.62,1474.55 ; 4997.69,1519.48 5564.62,1519.48 ; 5602,3449 6002,3449 6002,3847 5602,3847 ; 5602,3449 5602,3847 ; 5602,3449 3606,3449 3606,3847 5602,3847 ; 3514.92,951.02 3514.92,2939.2 6389.92,2939.2 6389.92,951.02 3514.92,951.02
  text "IMPEDANCE TABLE" at 3612,3909 h49.21
  text "LAYER" at 3685,3772 h49.21
  text "WIDTH" at 4143,3772 h49.21
  text "Clearance" at 4465,3772 h49.21
  text "TOLERANCE" at 5611,3771 h49.21
  text "Differential Impedence" at 4859,3769.66 h49.21
  text "Layer1,6" at 3685,3683 h49.21
  text "5.1mil" at 4132,3670 h49.21
  text "9.9mil" at 4512,3668 h49.21
  text "100 OHM" at 5004,3668 h49.21
  text "+/- 10%" at 5646,3668 h49.21
  text "Layer1,6" at 3685,3571.34 h49.21
  text "90 OHM" at 5011,3571.34 h49.21
  text "+/- 10%" at 5630,3571.34 h49.21
  text "6.1mil" at 4132,3569 h49.21
  text "8.9mil" at 4512,3569 h49.21
  text "MB1137 B" at -227,3077 h60
  text "LAYER STACK CONFIGURATION" at 4414.31,2737.68 h49.21
  text "6 LAYER BUILD" at 4602.95,2453.99 h49.21
  text "0.7mil" at 5839.25,2034.72 h39.37
  text "TOP LAYER" at 4215.1,2017.94 h49.21
  text "4mil" at 5621.18,1960.86 h39.37
  text "1.4mil" at 5839.25,1892.98 h39.37
  text "GND" at 4215.1,1885 h49.21
  text "13mil" at 5621.18,1833.93 h39.37
  text "MID LAYER 1" at 4215.1,1768.89 h49.21
  text "1.4mil" at 5837.72,1765.98 h39.37
  text "16.5mil" at 5621.18,1712.83 h39.37
  text "1.4mil" at 5839.69,1653.77 h39.37
  text "PWR" at 4215.1,1647.87 h49.21
  text "13mil" at 5621.18,1598.65 h39.37
  text "1.4mil" at 5839.69,1541.57 h39.37
  text "GND" at 4215.1,1537.63 h49.21
  text "4mil" at 5621.18,1478.57 h39.37
  text "0.7mil" at 5839.69,1417.55 h39.37
  text "BOTTOM LAYER" at 4215.1,1405.74 h49.21
  text "63mil" at 5068.87,1178.78 h49.21
  text "(plus soldermask thickness)" at 5400.71,1173.46 h49.21
  text "TOTAL BOARD THICKNESS: APPROX" at 3787.77,1172.91 h49.21
  text "Notes" at 4772.78,801.28 h49.21
  text "Silkscreen color : Blue ink PANTONE 2955" at 4987,681 h49.21
  text "Solder resist color : White" at 4991,596 h49.21
  text ".Legend" at 3703.99,-1199 h60

## Dimensions
2249.21,3049.61 to 2249.06,-2200.04 on Drill Drawing
-427.95,-2121.26 to 2327.95,-2121.26 on Drill Drawing

## Text inside footprints (layer, text, board x,y; h text height)
CN1: Mechanical 1 "Board edge" at 1280,3042.66 h7.87 r180
CN13: Mechanical 1 "Board edge" at 612,-2194.66 h7.87